# Altium PCB Panorama_V_0_0_1.PcbDoc (part 2 of 2)
Units mm, origin at the board's own origin, x right, y up, seen from the top; angles counter-clockwise.
Board outline 60 x 100 mm, 4 copper layers (Top Layer, Layer 2, Layer 3, Bottom Layer), stack 0.745 mm thick; 113 components, 88 nets, 449 pads, 202 vias.
Unrouted connection lines stored in the file: 3.
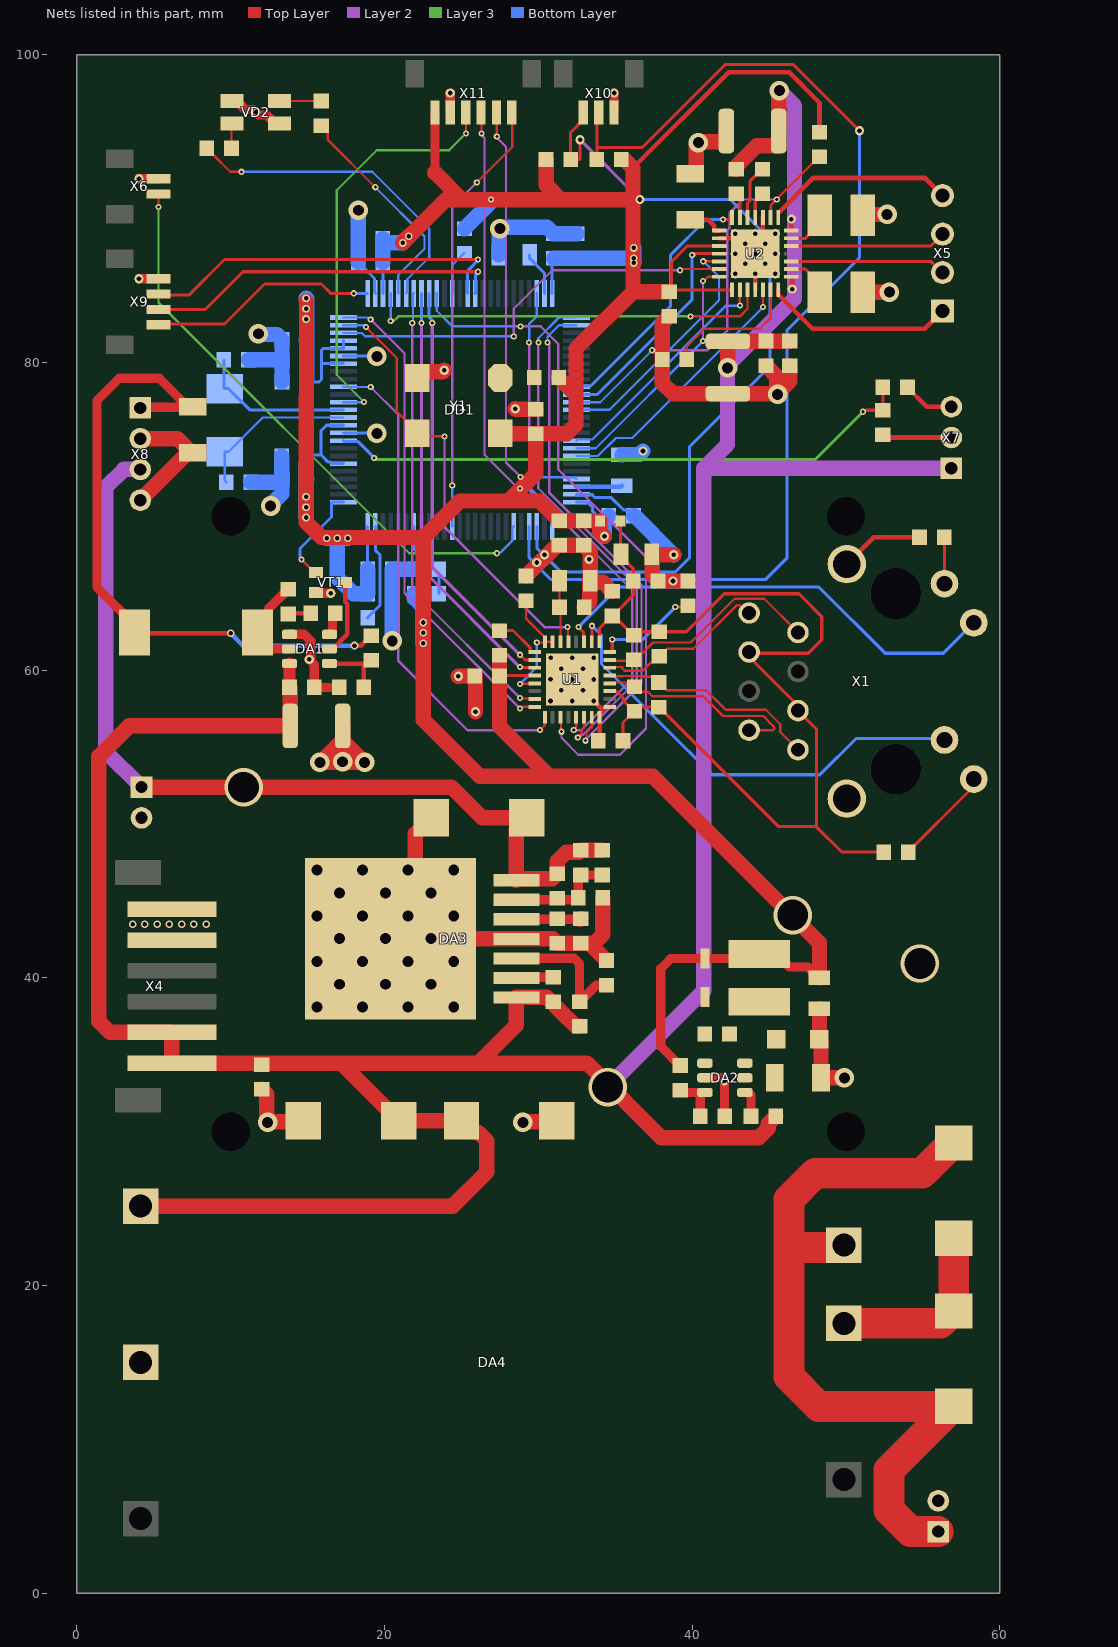
[diagram p4: the nets of this part, all layers, seen from the top]

## Via types
v1: diameter 0.6, hole 0.3, Top Layer to Layer 3, 42 vias
v2: diameter 1.27, hole 0.711, Top Layer to Layer 3, 35 vias
v3: diameter 0.4, hole 0.2, Layer 3 to Bottom Layer, 23 vias
v4: diameter 0.4, hole 0.2, Top Layer to Layer 3, 21 vias
v5: diameter 0.5, hole 0.3, Top Layer to Bottom Layer, tented both sides, 19 vias
v6: diameter 0.4, hole 0.2, Top Layer to Layer 2, 17 vias
v7: diameter 0.4, hole 0.2, Layer 2 to Bottom Layer, 15 vias
v8: diameter 1.27, hole 0.711, Layer 3 to Bottom Layer, 7 vias
v9: diameter 0.5, hole 0.3, Top Layer to Layer 3, tented both sides, 7 vias
v10: diameter 2.5, hole 2, Top Layer to Bottom Layer, 4 vias
v11: diameter 0.6, hole 0.3, Top Layer to Bottom Layer, 3 vias
v12: diameter 0.6, hole 0.3, Top Layer to Layer 2, 3 vias
v13: diameter 0.4, hole 0.2, Top Layer to Bottom Layer, 2 vias
v14: diameter 1.27, hole 0.711, Top Layer to Layer 2, 2 vias
v15: diameter 0.6, hole 0.3, Layer 2 to Bottom Layer, 1 vias
v16: diameter 0.6, hole 0.3, Layer 3 to Bottom Layer, 1 vias

## Nets (pads, with @x,y where several pads share a name; then routed paths per layer and width w, separated by ;. In a path a pad name is that pad's centre, name@x,y a point inside that pad or via, vN(x,y) a via of type N, cw(c..) or ccw(c..) an arc to the next point about the centre after c; other vN are vias at no path point)
+3V3: C8.2 C19.2 C20.2 C26.2 C27.2 C33.1 C40.2 C41.2 C42.2 C43.2 C44.2 C45.2 C46.2 C47.2 C48.2 C49.2 C50.2 C51.2 D3.1 DD1.6 DD1.11 DD1.19 DD1.21 DD1.22 DD1.28 DD1.50 DD1.75 DD1.100 FL1.1 L2.2 R5.2 R18.1 R21.2 R22.1 R26.2 R27.2 R31.1 R32.1 U1.12 U2.10 U2.15 X11.1 Y1.4 | length 257.2
  Top Layer w0.2: C26.2@27.475,59.625 27.501,59.651 28.671,59.651 U1.12@29.75,59.651 ; U2.10@41.75,87.575 39.675,87.575 38.65,86.55 38.65,84.725 U2.15@42.6,84.725
  Top Layer w0.3: 36.15,92.65 42.375,98.875 46.3,98.875 48.275,96.9 R26.2@48.275,94.975 ; C33.1@38.5,84.6 38.625,84.725 C33.1@38.65,84.725
  Top Layer w0.6: 23.275,92.35 X11.1@23.275,96.25 ; R5.2@39.225,34.3 39.2,34.3 37.95,35.55 37.95,40.6 38.6,41.25 D3.1@40.825,41.25 44.075,41.25 L2.2@44.375,41.55 45.475,41.55 46.325,40.7 47.524,40.7 47.875,40.349 47.875,40.175 48.05,40 C8.2@48.275,40
  Top Layer w1: v5@14.9,84 14.925,83.975 14.925,82.825 14.925,77.8 14.9,77.8 v5(14.9,71.275) v5(14.9,70.6) v5(14.9,69.925) 14.9,69.625 15.9,68.625 16.925,68.625 17.6,68.625 22.525,68.625 ; v5(21.175,87.775) 21.175,87.8 v5(21.575,88.2) ; v5@21.613,88.213 22.575,89.175 23.975,90.575 25.05,90.575 ; 23.275,92.35 25.05,90.575 ; v4@26.975,90.6 26.025,90.6 26,90.575 25.05,90.575 ; v4@27,90.575 31.475,90.575 ; R18.1@27.475,60.975 C26.2@27.475,59.625 27.475,56.35 30.7,53.125 ; Y1.4@27.525,75.4 27.55,75.375 C27.2@29.825,75.375 ; R32.1@30.525,93.2 30.525,91.525 31.475,90.575 ; R21.2@31.325,79.025 32.45,77.9 ; v11(34.3,68.7) 34.001,68.999 FL1.1@34.001,69.697 32.976,69.697 C20.2@32.951,69.722 C19.2@31.351,69.722 30.073,71 28.075,71 ; R31.1@35.6,93.2 36.15,92.65 36.15,90.575 ; v5@36.15,86.525 v5(36.2,86.475) ; C33.1@38.5,84.6 36.15,84.6 ; C8.2@48.275,40 48.275,40.349 48.275,42.275 46.503,44.046 37.45,53.1 30.7,53.1 26.2,53.1 22.525,56.775 v5(22.525,61.75) v5(22.525,62.425) v5(22.525,63.1) 22.525,68.625 ; 22.525,68.625 24.9,71 28.075,71 ; 28.075,71 29.825,72.75 C27.2@29.825,75.375 ; C27.2@29.825,75.375 31.864,75.375 32.45,75.961 32.45,77.9 ; 31.475,90.575 36.15,90.575 ; 32.45,77.9 32.45,80.9 36.15,84.6 ; 36.15,84.6 36.15,86.1 36.15,86.775 36.15,87.45 36.15,90.575
  Bottom Layer w0.2: C48.2@14.91,73.9 15.01,74 15.871,74 ; C50.2@14.935,78.744 15.744,78.744 15.9,78.9 15.9,79.85 ; C46.2@14.935,80.125 C46.2@15.135,79.925 ; C49.2@14.935,81.5 C49.2@15.01,81.425 ; DD1.6@17.325,73.425 16.6,73.425 16.5,73.525 16.346,73.525 15.871,74 ; DD1.11@17.325,75.925 16.225,75.925 15.871,75.571 15.871,74 ; DD1.19@17.325,79.925 15.975,79.925 15.9,79.85 ; DD1.22@17.325,81.425 DD1.21@17.325,80.925 16.025,80.925 15.9,80.8 15.9,79.85 ; DD1.100@18.9,69.35 18.9,66.56 C51.2@18.91,66.55 ; C44.2@19.885,86.525 19.9,86.51 DD1.28@19.9,84.5 ; DD1.50@30.9,84.5 30.9,86.69 C47.2@30.985,86.775 ; DD1.75@32.475,70.925 33.2,70.925 33.533,70.592 33.533,70.327 33.81,70.05 C45.2@34.585,70.05
  Bottom Layer w1: v5(14.9,69.925) v5(14.9,70.6) v5(14.9,71.275) 14.9,72.365 C43.2@14.935,72.4 14.902,72.433 C48.2@14.902,73.425 ; C49.2@14.9,81.465 C49.2@14.935,81.5 ; v5(14.9,84.175) v5@14.935,84.14 ; C50.2@14.935,78.744 C46.2@14.935,80.125 C49.2@14.935,81.5 ; v5(16.25,68.575) v5(16.925,68.575) ; v5(17.6,68.575) v5(16.925,68.575) ; C51.2@18.91,66.55 C40.2@18.91,64.975 17.975,64.975 16.925,66.025 v5(16.925,68.575) ; C44.2@19.885,86.525 C41.2@19.885,88.05 20.16,87.775 v5(21.175,87.775) 21.175,87.8 v5(21.575,88.2) ; R27.2@21.935,64.975 21.935,64.681 22.525,64.091 v5(22.525,63.1) v5(22.525,62.425) v5(22.525,61.75) ; R22.1@25.2,88.7 26.925,90.425 v3(26.925,90.6) ; C47.2@30.985,86.775 C42.2@32.51,86.775 35.525,86.775 v5(36.2,86.775) ; v11(34.3,68.7) 34.3,69.765 C45.2@34.585,70.05 ; v5(36.2,86.475) v5(36.2,86.775) ; v5(36.2,87.45) v5(36.2,86.775) ; C49.2@14.935,81.5 v5@14.935,84.14 ; C49.2@14.935,81.5 14.935,83.5 v5@14.935,84.14
  other v4: 26.925,90.6
  other v5: 14.9,82.825 14.9,83.5
  other v10: 46.539,44.082
+3V3_LAN: C18.2 C21.1 C22.1 C25.2 FL1.2 R12.2 R13.2 R14.2 R15.2 R16.2 U1.1 U1.27 X1.3 X1.6 | length 69.5
  Top Layer w0.2: U1.1@33.979,61.848 33.979,62.725 34.776,63.522 C22.1@34.801,63.522 ; U1.27@34.652,58.635 34.679,58.608 35.117,58.608 35.501,58.224 35.501,58.047 R16.2@36.226,57.322 ; FL1.2@35.351,69.697 35.351,67.547 C18.2@35.376,67.522 35.376,67.297 35.751,66.922 35.853,66.922 36.175,66.6 C25.2@36.175,65.8 36.175,64.871 34.826,63.522 C22.1@34.801,63.522 ; C21.1@35.501,55.422 35.501,56.597 R16.2@36.226,57.322 ; R12.2@52.453,48.174 49.726,48.174 48.075,49.825 ; C22.1@34.801,63.522 35.176,63.147 35.301,63.147 36.176,62.272 R13.2@36.201,62.272 36.426,62.497 R14.2@37.851,62.497 39.622,62.497 40.425,63.3 42.094,64.969 46.939,64.969 47.058,64.85 48.425,63.483 48.425,61.975 47.55,61.1 43.782,61.1 X1.6@43.703,61.179 43.703,61.1 43.703,60.861 46.878,57.686 X1.3@46.878,57.369 48.075,56.172 48.075,49.825 ; R16.2@36.226,57.322 R16.2@36.251,57.322 36.526,57.597 R15.2@37.826,57.597 37.851,57.597 45.623,49.825 48.075,49.825
+5V: C9.2 C10.2 C15.1 DA3.7 R7.2 X2.1 X8.3 | length 60.3
  Top Layer w1: X2.1@4.2,52.4 24.353,52.4 26.344,50.409 C15.1@29.249,50.409 29.249,50.334 28.575,49.66 DA3.7@28.575,46.345 28.681,46.451 30.917,46.451 R7.2@31.229,46.764 31.229,47.589 31.815,48.175 32.64,48.175 C9.2@32.753,48.288 C10.2@34.15,48.288
  Layer 2 w1: X8.3@4.125,73.05 3.05,73.05 1.875,71.875 1.875,54.725 X2.1@4.2,52.4
  other v10: 10.839,52.382
+12V: C1.2 C3.2 C4.1 C7.2 C13.1 C14.1 C35.1 C36.2 C37.2 C38.2 C39.2 DA1.3 DA2.5 DA3.1 DA4.4 R4.2 R8.1 R9.2 U2.22 U2.28 X4.1 X4.2 X7.1 | length 231.8
  Top Layer w0.3: C37.2@45.625,94.1 C37.2@45.625,95.05 ; C38.2@46.35,81.4 C38.2@46.45,81.5 ; U2.22@46.45,85.575 46.475,85.575 46.5,85.55 v12(46.5,84.775) ; U2.28@46.45,88.575 v12(46.45,89.325)
  Top Layer w0.8: C4.1@13.825,58.879 DA1.3@13.825,60.429
  Top Layer w1: DA4.4@4.14,25.16 24.435,25.16 26.65,27.375 26.65,29.389 26.064,29.975 25.65,29.975 25,30.625 C14.1@25,30.7 C13.1@20.925,30.7 20.925,30.775 20.275,31.425 20.2,31.425 17.175,34.45 ; C4.1@13.825,58.879 13.875,58.829 C3.2@13.875,56.379 3.404,56.379 1.425,54.4 1.425,37.175 2.15,36.45 X4.2@6.175,36.45 X4.1@6.175,34.45 17.175,34.45 ; R9.2@32.703,36.854 32.421,36.854 31.946,37.329 31.934,37.329 31.553,37.71 31.553,37.722 30.55,38.725 DA3.1@28.575,38.725 28.575,36.925 26.1,34.45 ; v14(42.3,79.65) 42.312,79.662 42.312,81.375 C36.2@42.325,81.375 46.325,81.375 C38.2@46.35,81.4 ; C35.1@42.875,92.575 42.875,92.769 44.206,94.1 C37.2@45.625,94.1 ; R4.2@45.425,31 44.95,30.525 44.95,30.231 44.319,29.6 38,29.6 33.15,34.45 26.1,34.45 ; C37.2@45.625,95.05 45.625,97.625 v14(45.675,97.675) ; 17.175,34.45 26.1,34.45
  Layer 2 w1: v10(34.5,32.9) 40.75,39.15 40.75,53.85 40.75,73.125 ; v14(45.675,97.675) 46.65,96.7 46.65,89.325 46.65,84.775 46.65,84.15 42.3,79.8 v14(42.3,79.65) 42.3,74.675 40.75,73.125 ; X7.1@56.85,73.125 40.75,73.125
+PWR_LASER: C5.2 L1.2 R2.2 X8.1 | length 43.2
  Top Layer w0.3: L1.2@3.75,62.45 3.8,62.5 3.9,62.4 v5(10,62.4) ; v5(18.05,61.6) 18.45,61.6 19.1,62.25 R2.2@19.125,62.25
  Top Layer w0.6: L1.2@3.75,62.45 3.75,62.95 1.3,65.4 1.3,77.525 2.75,78.975 5.35,78.975 7.2,77.125 C5.2@7.525,77.125 7.488,77.088 4.163,77.088 X8.1@4.125,77.05
  Bottom Layer w0.3: v5(10,62.4) 10.8,61.6 v5(18.05,61.6)
+V_EXT: C11.1 C12.1 DA4.3 X3.1 | length 51.2
  Top Layer w2: DA4.3@49.86,22.62 49.71,22.47 46.47,22.47 46.3,22.3 ; X3.1@56,4 54.2,4 52.8,5.4 52.8,8.015 C12.1@56.925,12.14 ; C12.1@57,12.14 C12.1@56.925,12.14 ; C11.1@57,29.262 56.925,29.262 54.963,27.3 48,27.3 46.3,25.6 46.3,22.3 ; 46.3,22.3 46.3,14.072 48.232,12.14 C12.1@56.925,12.14
BASLER_INPUT_LINE: DD1.81 X6.1 | length 38.1
  Top Layer w0.15: v4(5.3,90.1) 5.3,90.937 X6.1@5.313,90.95
  Layer 3 w0.15: v4(5.3,90.1) 5.3,83.9 21.6,67.6 v3(27.3,67.6)
  Bottom Layer w0.15: v3(27.3,67.6) 27.348,67.648 27.541,67.648 28.325,68.432 28.325,69.275 DD1.81@28.4,69.35
CLK: DD1.23 U2.13 | length 27.4
  Top Layer w0.15: v6(39.2,86) 39.268,86 39.343,86.075 U2.13@41.75,86.075
  Layer 2 w0.15: v7(28.4,81.7) 28.4,83.5 30.9,86 v6(39.2,86)
  Bottom Layer w0.15: DD1.23@17.325,81.925 18.525,81.925 18.751,81.7 v7(28.4,81.7)
DAC: DD1.29 U2.17 | length 26.6
  Top Layer w0.15: v4(39.9,83) 43.1,83 43.6,83.5 U2.17@43.6,84.725
  Layer 3 w0.15: v3(20.4,82.7) 20.6,82.7 20.9,83 v4(39.9,83)
  Bottom Layer w0.15: v3(20.4,82.7) DD1.29@20.4,84.5
DIAG: DD1.61 U2.11 | length 14.8
  Top Layer w0.2: v3(40,87) 40.054,87 40.129,87.075 U2.11@41.75,87.075
  Bottom Layer w0.2: DD1.61@32.475,77.925 33.825,77.925 40,84.1 v3(40,87)
  other v4: 40,87
DIR: DD1.69 U2.19 | length 17.3
  Top Layer w0.15: v3(44.6,83.6) U2.19@44.6,84.725
  Bottom Layer w0.15: DD1.69@32.475,73.925 33.867,73.925 35.042,75.1 36.1,75.1 v3(44.6,83.6)
  other v4: 44.6,83.6
E\N\A\B\L\E\_Step: DD1.62 R26.1 U2.2 | length 28.2
  Top Layer w0.15: U2.2@45.1,89.425 45.1,90.2 v6(45.5,90.6) 45.5,90.625 48.25,93.375 R26.1@48.275,93.375
  Layer 2 w0.15: v7(37.4,80.8) 41,80.8 42.275,82.075 42.275,88.593 42.425,88.743 42.425,89.725 43.3,90.6 v6(45.5,90.6)
  Bottom Layer w0.15: DD1.62@32.475,77.425 34.025,77.425 v7(37.4,80.8)
EN_LED: DD1.40 X9.2 | length 23.2
  Top Layer w0.2: X9.2@5.313,83.45 8.35,83.45 10.8,85.9 v4(26.075,85.9)
  Bottom Layer w0.2: DD1.40@25.9,84.5 25.904,84.504 25.904,85.675 26.075,85.846 v4(26.075,85.9)
  other v3: 26.075,85.9
ETH_CRS_DV: DD1.32 U1.15 | length 30.2
  Top Layer w0.15: v6(28.8,58.2) 28.837,58.164 29.713,58.164 U1.15@29.75,58.127
  Layer 2 w0.15: v7(21.8,82.575) 21.8,65.2 v6(28.8,58.2)
  Bottom Layer w0.15: v7(21.8,82.575) 21.848,82.623 21.848,84.448 DD1.32@21.9,84.5
ETH_MDC: DD1.16 U1.17 | length 32.4
  Top Layer w0.15: v6(30.1,56.1) 30.35,56.35 30.409,56.409 30.409,56.931 U1.17@30.423,56.946
  Layer 2 w0.15: v7(19.1,78.4) 20.9,76.6 20.9,60.6 25.4,56.1 v6(30.1,56.1)
  Bottom Layer w0.15: DD1.16@17.325,78.425 17.337,78.412 19.087,78.412 v7(19.1,78.4)
ETH_MDIO: DD1.25 U1.16 | length 32.1
  Top Layer w0.15: v6(28.8,57.5) 28.868,57.5 28.987,57.619 U1.16@29.75,57.619
  Layer 2 w0.15: v7(19.1,82.8) 21.3,80.6 21.3,65 v6(28.8,57.5)
  Bottom Layer w0.15: DD1.25@17.325,82.925 18.907,82.925 19.032,82.8 v7(19.1,82.8)
ETH_REF_CLK: DD1.24 U1.5 Y1.3 | length 29.2
  Top Layer w0.15: v4(18.8,82.3) 20.8,80.3 20.8,76.825 22.125,75.5 Y1.3@22.125,75.4 22.325,75.2 v6(23.9,75.2) ; v6(31.9,62.8) 31.924,62.776 31.924,61.872 U1.5@31.947,61.848
  Layer 2 w0.15: v6(23.9,75.2) 23.9,69.3 30.4,62.8 v6(31.9,62.8)
  Bottom Layer w0.15: DD1.24@17.325,82.425 18.675,82.425 v4(18.8,82.3)
  other v3: 18.8,82.3
ETH_RXD0: DD1.33 U1.11 | length 27.9
  Top Layer w0.2: v6(28.8,60.2) 28.821,60.18 29.729,60.18 U1.11@29.75,60.159
  Layer 2 w0.2: v7(22.4,82.575) 22.4,66.6 v6(28.8,60.2)
  Bottom Layer w0.2: v7(22.4,82.575) DD1.33@22.4,84.5
ETH_RXD1: DD1.34 U1.10 | length 27
  Top Layer w0.2: v6(28.8,61) 29.133,60.667 U1.10@29.75,60.667
  Layer 2 w0.2: v7(23.1,82.575) 23.1,66.7 v6(28.8,61)
  Bottom Layer w0.2: DD1.34@22.9,84.5 22.9,82.954 23.1,82.754 v7(23.1,82.575)
ETH_TX_EN: DD1.48 U1.21 | length 34.1
  Top Layer w0.15: v6(32.3,56.1) 32.3,56.159 32.455,56.314 U1.21@32.455,56.946
  Layer 2 w0.15: v7(29.4,81.3) 29.4,71.9 36.1,65.2 36.1,59.43 32.77,56.1 v6(32.3,56.1)
  Bottom Layer w0.15: v7(29.4,81.3) 29.4,82.5 29.9,83 DD1.48@29.9,84.5
ETH_TXD0: DD1.51 U1.22 | length 34.8
  Top Layer w0.15: v6(32.564,55.618) 32.564,55.685 32.824,55.945 32.824,56.092 32.963,56.231 U1.22@32.963,56.946
  Layer 2 w0.15: v7(30,81.3) 30,71.833 36.4,65.433 36.4,59.306 32.894,55.8 32.859,55.8 32.782,55.723 32.652,55.723 32.564,55.635 v6(32.564,55.618)
  Bottom Layer w0.15: v7(30,81.3) 30,81.581 31.344,82.925 DD1.51@32.475,82.925
ETH_TXD1: DD1.52 U1.23 | length 34.2
  Top Layer w0.15: v6(33.076,55.416) 33.124,55.464 33.124,55.805 33.134,55.815 33.134,55.948 33.471,56.285 U1.23@33.471,56.946
  Layer 2 w0.15: v7(30.6,81.3) 30.7,81.2 30.7,71.558 36.7,65.558 36.7,59.123 35.6,58.023 33.076,55.499 v6(33.076,55.416)
  Bottom Layer w0.15: v7(30.6,81.3) 30.6,81.681 31.344,82.425 DD1.52@32.475,82.425
ETHERNET_RST: DD1.35 U1.19 | length 45.3
  Top Layer w0.15: U1.19@31.439,56.946 31.47,56.915 31.47,56.03 v6(31.5,56)
  Layer 2 w0.15: v7(28.85,82.35) 30.151,82.35 31.3,81.201 31.3,73.05 37,67.35 37,56.2 35.303,54.503 32.597,54.503 31.5,55.6 v6(31.5,56)
  Bottom Layer w0.15: DD1.35@23.4,84.5 23.4,83.369 24.419,82.35 v7(28.85,82.35)
GND: C1.1 C3.1 C4.2 C5.1 C7.1 C8.1 C13.2 C14.2 C15.2 C16.1 C17.1 C18.1 C19.1 C20.1 C21.2 C22.2 C23.2 C24.2 C25.1 C26.1 C27.1 C29.1 C30.1 C31.1 C32.1 C33.2 C34.1 C36.1 C37.1 C38.1 C39.1 C40.1 C41.1 C42.1 C43.1 C44.1 C45.1 C46.1 C47.1 C48.1 C49.1 C50.1 C51.1 DA1.1 DA2.2 DA3.4 DA3.8 DA4.5 DD1.10 DD1.20 DD1.27 DD1.74 R3.1 R6.1 R10.1 R11.1 R17.2 R19.1 R20.1 R23.2 R24.1 R25.1 R29.2 R30.1 R36.1 U1.24 U1.25 U1.33 U2.3 U2.9 U2.18 U2.29 VD1.1 VD2.1 VD2.3 VT1.2 X1.13 X1.14 X2.2 X4.5 X4.6 X6.2 X7.3 X8.2 X8.4 X9.4 X10.3 X11.2 Y1.2 | length 199.4
  Top Layer w0.3: v1(32.201,59.397) 33.597,58.002 34.199,57.399 ; C21.2@33.901,55.422 33.979,55.5 U1.24@33.979,56.946 33.979,57.179 34.199,57.399 ; U1.25@34.652,57.619 34.419,57.619 34.199,57.399 ; U2.9@41.75,88.075 43.1,88.075 v1(43.45,87.725) v1(44.1,87.075) ; U2.18@44.1,84.725 v1(44.1,87.075) ; U2.3@44.6,89.425 44.6,87.575 v1(44.1,87.075) ; X1.13@50.053,66.894 51.809,68.65 R19.1@54.775,68.65 ; R36.1@54,78.4 54,78.375 55.25,77.125 X7.3@56.85,77.125
  Top Layer w0.6: v1(4.038,85.45) X9.4@5.313,85.45 ; v1(4.038,91.95) X6.2@5.313,91.95 ; VD2.3@10.075,97 10.375,97 10.925,96.45 11.45,96.45 v1(11.625,96.275) 11.8,96.1 12.325,96.1 12.875,95.55 VD2.1@13.175,95.55 ; DA1.1@13.825,62.329 14.771,62.329 15.2,61.9 15.2,60.8 v1(15.1,60.7) 15.425,60.375 C4.2@15.425,58.879 R3.1@17.05,58.879 ; VT1.2@15.55,65.05 15.6,65 v1(16.5,65) ; X11.2@24.275,96.25 v1(24.275,97.525) ; X10.3@34.921,96.25 34.921,97.521 v1(34.925,97.525) ; DA2.2@40.825,33.5 41.9,33.5 v1(42.1,33.3) 42.1,31.025 R6.1@42.125,31
  Top Layer w1: X8.4@4.125,71.05 7.125,74.05 C5.1@7.125,74.2 ; X8.2@4.125,75.05 6.539,75.05 7.125,74.464 C5.1@7.125,74.2 ; C5.1@7.525,74.125 7.2,74.125 C5.1@7.125,74.2 ; C1.1@12.025,32.75 12.348,32.427 12.348,30.652 v2(12.4,30.6) 12.45,30.65 14.675,30.65 C13.2@14.725,30.7 ; v2(15.8,54) v2@15.846,54 ; v2@17.2,53.973 v2@17.227,54 ; C3.1@17.275,56.379 C3.1@17.275,55.429 ; Y1.2@22.125,79 22.125,79.1 22.425,79.4 23.775,79.4 v1(23.875,79.5) ; C15.2@23.049,50.409 C15.2@21.999,49.359 ; v1(24.8,59.6) 24.825,59.625 C26.1@25.875,59.625 25.915,59.585 v1(25.915,57.303) ; v1(28.5,77) 28.525,76.975 C27.1@29.825,76.975 ; v2(29,30.6) 29.05,30.65 31.15,30.65 C14.2@31.2,30.7 ; v1@29.988,66.913 R20.1@29.2,66.125 C19.1@31.197,68.122 ; v1@30.488,67.413 C19.1@31.197,68.122 ; C24.2@32.976,64.097 33.351,64.472 33.351,65.797 C23.2@33.376,65.822 ; R10.1@34.188,45.202 34.188,42.813 33.618,42.243 33.314,42.243 ; R11.1@34.428,41.129 33.314,42.243 ; C22.2@34.801,65.122 34.201,65.722 33.401,65.722 33.376,65.747 C23.2@33.376,65.822 ; C18.1@37.376,67.522 C18.1@37.398,67.5 ; C33.2@38.5,83 38.05,82.55 R30.1@38.05,80.2 38.05,78.675 38.75,77.975 C36.1@42.325,77.975 v2@45.5,77.975 ; v11(38.8,67.5) C18.1@37.398,67.5 ; R17.2@39.725,65.8 v1(38.75,65.8) C25.1@37.775,65.8 37.401,66.174 37.401,67.497 C18.1@37.398,67.5 ; C29.1@39.875,92.275 40.2,92.275 40.275,92.35 40.275,94.102 40.4,94.227 v2(40.4,94.3) 40.452,94.352 42.225,94.352 C37.1@42.225,95.05 ; C39.1@44.8,79.8 45.498,79.102 45.498,77.977 v2@45.5,77.975 ; v2(45.55,77.925) v2@45.5,77.975 ; C38.1@46.35,79.8 46.35,78.798 45.527,77.975 v2@45.5,77.975 ; C8.1@48.275,38 VD1.1@48.275,36 48.375,35.9 C7.1@48.375,33.5 v2(49.9,33.5) ; R24.1@51.1,84.575 v2(52.825,84.575) ; R25.1@51.1,89.575 51.15,89.625 v2(52.675,89.625) ; v2@15.846,54 C3.1@17.275,55.429 ; v2@15.846,54 v2@17.227,54 ; v2@17.227,54 v2(18.7,54) 18.7,54.004 C3.1@17.275,55.429 ; v2@17.227,54 v2(17.275,54.048) C3.1@17.275,55.429 ; DA3.8@21.999,44.151 21.999,47 C15.2@21.999,49.359 ; DA3.8@21.999,44.151 C15.2@21.999,49.359 ; DA3.8@21.999,44.151 DA3.8@20.383,42.535 DA3.4@28.575,42.535 30.937,42.535 C17.1@31.229,42.243 C16.1@32.753,42.243 33.314,42.243 ; C19.1@31.197,68.122 C19.1@31.351,68.122 C20.1@32.951,68.122 33.376,67.697 C23.2@33.376,65.822
  Bottom Layer w0.2: DD1.10@17.325,75.425 17.375,75.425 17.4,75.4 17.413,75.412 19.487,75.412 v8(19.5,75.4) ; DD1.20@17.325,80.425 17.337,80.412 19.487,80.412 v8(19.5,80.4) ; C44.1@18.285,86.525 18.285,86.5 18.66,86.125 18.685,86.125 19.35,85.46 19.35,84.55 DD1.27@19.4,84.5 ; DD1.74@32.475,71.425 32.497,71.403 33.502,71.403 33.685,71.22 34.744,71.22 35.55,70.414 35.821,70.414 C45.1@36.185,70.05
  Bottom Layer w1: C31.1@11.16,80.175 13.285,80.175 C46.1@13.335,80.125 ; C30.1@11.31,72.225 13.16,72.225 C43.1@13.335,72.4 ; v8(11.8,81.873) 11.852,81.821 13.014,81.821 C49.1@13.335,81.5 C46.1@13.335,80.125 ; v8(12.6,70.673) 12.6,70.746 13.335,71.481 C43.1@13.335,72.4 ; C48.1@13.31,73.9 13.31,72.425 C43.1@13.335,72.4 ; C50.1@13.335,78.744 C46.1@13.335,80.125 ; C44.1@18.285,86.525 C41.1@18.285,88.05 18.285,89.885 v8(18.3,89.9) ; v8(20.5,61.9) 20.51,61.91 R23.2@20.51,63.4 C40.1@20.51,64.975 C51.1@20.51,66.55 R29.2@21.935,66.55 ; C32.1@27.435,87 27.46,87.025 v8@27.46,88.575 ; v8(27.5,88.7) 27.573,88.7 27.673,88.8 30.56,88.8 C47.1@30.985,88.375 C42.1@32.51,88.375 ; C34.1@35.435,74 35.46,74.025 36.575,74.025 v16(36.8,74.25) ; C45.1@36.185,70.05 36.25,70.05 v11(38.8,67.5)
  other v1: 30.793,57.998 32.193,57.998 33.593,57.998 31.5,58.7 32.9,58.7 33.601,59.397 30.793,59.398 31.5,60.1 32.9,60.1 30.801,60.797 32.201,60.797 33.601,60.797 29.9,67 33.3,67.2 30.4,67.5 42.8,85.775 44.1,85.775 45.4,85.775 43.45,86.425 44.75,86.425 42.8,87.075 45.4,87.075 44.75,87.725 42.8,88.375 44.1,88.375 45.4,88.375
  other v2: 15.6,38.1 18.567,38.1 21.533,38.1 24.5,38.1 17.083,39.583 20.05,39.583 23.017,39.583 15.6,41.067 18.567,41.067 21.533,41.067 24.5,41.067 17.083,42.55 20.05,42.55 23.017,42.55 15.6,44.033 18.567,44.033 21.533,44.033 24.5,44.033 17.083,45.517 20.05,45.517 23.017,45.517 15.6,47 18.567,47 21.533,47 24.5,47
  other v9: 3.625,43.475 4.421,43.475 5.217,43.475 6.012,43.475 6.808,43.475 7.604,43.475 8.4,43.475
  other v10: 54.805,40.93
GND_EXT: C11.2 C12.2 DA4.2 X3.2 | length 12.2
  Top Layer w2: DA4.2@49.86,17.54 56.125,17.54 56.925,18.34 C12.2@57,18.34 C11.2@57,23.062
GR_A: R12.1 X1.9 | length 6.5
  Top Layer w0.2: R12.1@54.053,48.174 54.053,48.199 58.002,52.148 58.002,52.618 X1.9@58.308,52.924
GR_K: U1.2 X1.10 | length 30.1
  Top Layer w0.2: U1.2@33.471,61.848 33.486,61.863 v4(33.486,62.886)
  Bottom Layer w0.2: v4(33.486,62.886) 34.1,62.271 34.1,60.4 38.2,56.3 41.3,53.2 48.3,53.2 50.659,55.559 56.308,55.559 X1.10@56.403,55.464
  other v3: 33.486,62.886
INDEX: DD1.63 U2.12 | length 16.2
  Top Layer w0.15: v4(40.718,86.582) 40.722,86.578 41.747,86.578 U2.12@41.75,86.575
  Bottom Layer w0.15: DD1.63@32.475,76.925 34.625,76.925 41.75,84.05 41.75,85.575 40.743,86.582 v4(40.718,86.582)
  other v3: 40.718,86.582
LASER_CURRENT: DD1.26 X9.1 | length 14.9
  Top Layer w0.2: X9.1@5.313,82.45 5.362,82.5 9.6,82.5 12.2,85.1 15.9,85.1 16.5,84.5 v4(18,84.5)
  Bottom Layer w0.2: v4(18,84.5) DD1.26@18.9,84.5
  other v3: 18,84.5
LASER_ENABLE: DD1.1 VT1.1 | length 6.7
  Top Layer w0.2: v3(14.6,67.2) 15.45,66.35 VT1.1@15.55,66.35
  Bottom Layer w0.2: v3(14.6,67.2) 14.5,67.3 14.5,67.912 16.55,69.962 16.55,70.875 16.6,70.925 DD1.1@17.325,70.925
  other v4: 14.6,67.2
LED_GREEN: DD1.30 R33.1 | length 14.4
  Top Layer w0.15: R33.1@15.875,95.4 15.9,95.4 16.3,95 16.3,94.5 v4(19.4,91.4)
  Bottom Layer w0.15: v4(19.4,91.4) 22.6,88.2 22.6,87.4 20.9,85.7 DD1.30@20.9,84.5
  other v3: 19.4,91.4
LED_RED: DD1.31 R34.1 | length 21.5
  Top Layer w0.15: R34.1@8.45,93.925 8.45,93.9 8.85,93.5 8.875,93.5 9.975,92.4 v4(10.7,92.4)
  Bottom Layer w0.15: v4(10.7,92.4) 19.2,92.4 22.9,88.7 22.9,86.843 21.475,85.418 21.475,84.575 DD1.31@21.4,84.5
  other v3: 10.7,92.4
MOTOR_A1: U2.24 X5.2 | length 10.1
  Top Layer w0.2: U2.24@46.45,86.575 55.515,86.575 56.24,85.85 X5.2@56.275,85.85
MOTOR_A2: U2.21 X5.1 | length 12.4
  Top Layer w0.3: U2.21@45.6,84.725 45.6,84.425 47.825,82.2 55.125,82.2 X5.1@56.275,83.35
MOTOR_B1: U2.26 X5.3 | length 10.1
  Top Layer w0.2: U2.26@46.45,87.575 55.5,87.575 X5.3@56.275,88.35
MOTOR_B2: U2.1 X5.4 | length 12.1
  Top Layer w0.3: U2.1@45.625,89.75 47.875,92 55.125,92 X5.4@56.275,90.85
NERROR: DD1.39 X9.3 | length 24.2
  Top Layer w0.2: X9.3@5.313,84.45 5.363,84.4 7.3,84.4 9.6,86.7 v3(26.075,86.7)
  Bottom Layer w0.2: DD1.39@25.4,84.5 25.4,85.971 26.075,86.646 v3(26.075,86.7)
  other v4: 26.075,86.7
NetC2_1: C2.1 DA1.2 L1.1 | length 6.4
  Top Layer w0.6: C2.1@13.75,65.25 13.725,65.25 12.45,63.975 12.45,62.779 11.936,62.264 11.75,62.079 12.45,61.379 DA1.2@13.825,61.379
NetC2_2: C2.2 R1.2 | length 1.5
  Top Layer w0.3: C2.2@13.75,63.65 13.8,63.7 R1.2@15.2,63.7
NetC6_1: C6.1 DA2.6 L2.1 VD1.2
NetC6_2: C6.2 D3.2 DA2.1
NetC9_1: C9.1 C10.1 DA3.6 R7.1 R10.2 | length 7
  Top Layer w0.6: DA3.6@28.575,45.075 32.461,45.075 R10.2@32.588,45.202 32.588,46.523 C9.1@32.753,46.688 C10.1@34.15,46.688
NetC16_2: C16.2 C17.2 DA3.5 | length 4.2
  Top Layer w0.6: DA3.5@28.575,43.805 C16.2@32.715,43.805
  Top Layer w1: C16.2@32.715,43.805 C16.2@32.753,43.843
NetC23_1: C23.1 C24.1 U1.6 | length 4
  Top Layer w0.15: C23.1@31.376,65.822 C24.1@31.376,64.097 31.439,64.034 U1.6@31.439,61.848
NetC28_1: C28.1 U2.5 | length 3.6
  Top Layer w0.2: U2.5@43.6,89.425 43.6,90.371 43.75,90.521 43.75,91.775 44.55,92.575 C28.1@44.575,92.575
NetC28_2: C28.2 U2.4 | length 1.8
  Top Layer w0.2: U2.4@44.1,89.425 44.1,90.525 44.55,90.975 C28.2@44.575,90.975
NetC29_2: C29.2 U2.8 | length 2.3
  Top Layer w0.3: C29.2@39.875,89.275 41.05,89.275 41.425,88.9 41.425,88.6 41.45,88.575 U2.8@41.75,88.575
NetC32_2: C32.2 DD1.49 | length 2.9
  Bottom Layer w0.2: C32.2@29.435,87 29.435,86.775 30.4,85.81 DD1.49@30.4,84.5
NetC34_2: C34.2 DD1.73 | length 3
  Bottom Layer w0.3: DD1.73@32.475,71.925 35.36,71.925 C34.2@35.435,72
NetC35_2: C35.2 U2.6 | length 1.6
  Top Layer w0.2: C35.2@42.875,90.975 43.1,90.75 U2.6@43.1,89.425
NetDA1_4: DA1.4 R2.1 R3.2 | length 4.4
  Top Layer w0.3: DA1.4@16.425,60.429 R2.1@18.879,60.429 ; R3.2@18.65,58.879 18.65,60.2 R2.1@18.879,60.429 ; R2.1@19.125,60.65 19.1,60.65 R2.1@18.879,60.429
NetDA1_5: DA1.5 VT1.3 | length 5
  Top Layer w0.3: DA1.5@16.425,61.379 16.625,61.379 17.575,62.329 17.575,64.324 17.45,64.449 VT1.3@17.45,65.7
NetDA1_6: DA1.6 R1.1 | length 1.6
  Top Layer w0.6: DA1.6@16.425,62.329 16.625,62.329 16.625,62.529 16.625,63.525 R1.1@16.8,63.7
NetDA2_3: DA2.3 R5.1 R6.2 | length 3.3
  Top Layer w0.6: R5.1@39.225,32.7 39.375,32.55 DA2.3@40.625,32.55 ; R6.2@40.525,31 40.525,32.45 DA2.3@40.625,32.55 ; DA2.3@40.825,32.55 DA2.3@40.625,32.55
NetDA2_4: DA2.4 R4.1 | length 1.8
  Top Layer w0.6: DA2.4@43.425,32.55 43.625,32.55 43.825,32.35 R4.1@43.825,31
NetDA3_2: DA3.2 R8.2 | length 2.4
  Top Layer w0.6: DA3.2@28.575,39.995 28.613,40.033 R8.2@30.975,40.033
NetDA3_3: DA3.3 R9.1 R11.2 | length 8.6
  Top Layer w0.6: DA3.3@28.575,41.265 32.324,41.265 32.675,40.914 32.675,38.629 32.703,38.601 R9.1@32.703,38.454 ; R9.1@32.875,38.626 33.778,39.529 R11.2@34.428,39.529
NetDD1_37: DD1.37 R22.2 | length 2.9
  Bottom Layer w0.15: DD1.37@24.4,84.5 24.4,86.325 25.175,87.1 R22.2@25.2,87.1
NetDD1_94: DD1.94 R27.1 R29.1 | length 5.1
  Bottom Layer w0.2: DD1.94@21.9,69.35 21.9,67.914 23.535,66.279 R27.1@23.535,64.975
NetDD1_99: DD1.99 R23.1 | length 6.4
  Bottom Layer w0.2: R23.1@18.91,63.4 18.91,63.425 19.7,64.215 19.7,67.5 19.4,67.8 DD1.99@19.4,69.35
NetR17_1: R17.1 U1.32 | length 6.8
  Top Layer w0.2: U1.32@34.652,61.175 34.778,61.175 34.805,61.202 v4(34.805,62) ; v3(38.9,64.1) 39.625,64.1 R17.1@39.725,64.2
  Bottom Layer w0.2: v4(34.805,62) 36.8,62 v3(38.9,64.1)
  other v3: 34.805,62
  other v4: 38.9,64.1
NetR18_2: R18.2 U1.9 | length 3
  Top Layer w0.2: R18.2@27.475,62.575 28.35,62.575 29.471,61.454 29.471,61.202 29.498,61.175 U1.9@29.75,61.175
NetR20_2: R20.2 U1.7 U1.8 U1.13 | length 8.4
  Top Layer w0.15: v13(28.8,59.1) 28.821,59.121 29.729,59.121 U1.13@29.75,59.143 ; R20.2@29.2,64.525 29.2,63.351 30.423,62.127 U1.8@30.423,61.848 ; v3(29.9,61.8) 30.375,61.8 U1.8@30.423,61.848 ; U1.7@30.931,61.848 U1.8@30.423,61.848
  Bottom Layer w0.15: v13(28.8,59.1) 29.9,60.2 v3(29.9,61.8)
  other v3: 28.8,59.1
  other v13: 29.9,61.8
NetR21_1: R21.1 Y1.1
NetR24_2: R24.2 U2.23 | length 2.8
  Top Layer w0.2: U2.23@46.45,86.075 47.35,86.075 48.3,85.125 R24.2@48.3,84.575
NetR25_2: R25.2 U2.27 | length 2.8
  Top Layer w0.2: U2.27@46.45,88.075 47.35,88.075 48.3,89.025 R25.2@48.3,89.575
NetR30_2: R30.2 U2.20 | length 8.9
  Top Layer w0.15: R30.2@39.65,80.2 39.65,81.05 40.8,82.2 44.4,82.2 45.1,82.9 U2.20@45.1,84.725
NetR33_2: R33.2 VD2.4 | length 2.7
  Top Layer w0.15: VD2.4@13.175,97 R33.2@15.875,97
NetR34_2: R34.2 VD2.2 | length 1.6
  Top Layer w0.15: R34.2@10.05,93.925 10.05,95.525 VD2.2@10.075,95.55
NRST: DD1.14 X11.3 | length 27.2
  Top Layer w0.15: X11.3@25.275,96.25 25.3,96.225 v4(25.3,94.9)
  Layer 3 w0.15: v3(18.675,77.425) 16.9,79.2 16.9,91.2 19.5,93.8 24.2,93.8 v4(25.3,94.9)
  Bottom Layer w0.15: DD1.14@17.325,77.425 v3(18.675,77.425)
OSC_IN: C30.2 DD1.12 XTAL1.1 | length 10.7
  Bottom Layer w0.15: C30.2@9.71,72.225 9.61,72.325 XTAL1.1@9.61,74.2 9.86,74.2 12.085,76.425 DD1.12@17.325,76.425
OSC_OUT: C31.2 DD1.13 XTAL1.2 | length 10.2
  Bottom Layer w0.2: C31.2@9.56,80.175 9.56,78.35 XTAL1.2@9.61,78.3 9.86,78.3 11.235,76.925 DD1.13@17.325,76.925
Photo_Transistor: DD1.9 R35.1 R36.2 | length 38.4
  Top Layer w0.2: v4(51.1,76.8) 51.154,76.8 51.254,76.9 R35.1@52.4,76.9 R36.2@52.4,78.4
  Layer 3 w0.2: v3(19.329,73.8) 19.429,73.7 48,73.7 v4(51.1,76.8)
  Bottom Layer w0.2: DD1.9@17.325,74.925 17.375,74.875 18.254,74.875 v3(19.329,73.8)
Photo_Transistor_Out: R35.2 X7.2 | length 4.5
  Top Layer w0.3: R35.2@52.4,75.3 52.575,75.125 X7.2@56.85,75.125
RX_N: R14.1 U1.30 X1.8 | length 11.2
  Top Layer w0.15: U1.30@34.652,60.159 34.704,60.211 35.071,60.211 35.452,60.211 35.452,60.128 35.608,59.972 36.794,59.972 37.319,60.497 37.451,60.497 R14.1@37.851,60.897 37.876,60.897 38.276,61.297 38.276,61.305 38.364,61.393 40.069,61.393 42.916,64.24 43.04,64.24 43.561,63.719 X1.8@43.703,63.719
RX_P: R13.1 U1.31 X1.7 | length 14.8
  Top Layer w0.15: U1.31@34.652,60.667 34.704,60.615 36.144,60.615 R13.1@36.201,60.672 36.601,61.072 36.733,61.072 37.458,61.797 39.902,61.797 42.749,64.644 44.683,64.644 X1.7@46.878,62.449
RXD: DD1.79 R31.2 X10.2 | length 74.7
  Top Layer w0.2: X10.2@33.921,96.25 33.8,96.129 R31.2@33.8,93.2 33.8,93.98 36.754,93.98 42.139,99.365 46.584,99.365 v11(50.876,95.072)
  Bottom Layer w0.2: DD1.79@29.4,69.35 29.4,67.31 30.822,65.888 44.755,65.888 46.177,67.31 46.177,82.118 50.876,86.817 v11(50.876,95.072)
SPREAD: DD1.60 U2.7 | length 16.7
  Top Layer w0.2: v3(42,89.3) 42.575,89.3 42.6,89.325 U2.7@42.6,89.425
  Bottom Layer w0.2: DD1.60@32.475,78.425 32.525,78.475 33.404,78.475 38.6,83.671 38.6,87 40.9,89.3 v3(42,89.3)
  other v4: 42,89.3
STEP: DD1.67 U2.16 | length 15.3
  Top Layer w0.15: v4(43.1,83.7) U2.16@43.1,84.725
  Bottom Layer w0.15: DD1.67@32.475,74.925 32.55,75 33.5,75 42.2,83.7 v4(43.1,83.7)
  other v3: 43.1,83.7
SWCLK: DD1.76 X11.4 | length 29.2
  Top Layer w0.15: X11.4@26.275,96.25 26.3,96.225 v6(26.3,94.9)
  Layer 2 w0.15: v6(26.3,94.9) 26.3,94.8 26.5,94.6 26.5,74 28.599,71.901 28.632,71.901 28.732,71.8 v7(28.8,71.8)
  Bottom Layer w0.15: v7(28.8,71.8) 29.293,71.8 30.825,70.268 30.825,69.425 DD1.76@30.9,69.35
SWDIO: DD1.72 X11.5 | length 28
  Top Layer w0.15: X11.5@27.275,96.25 27.3,96.225 v6(27.3,94.7)
  Layer 2 w0.15: v6(27.3,94.7) 27.3,94.632 27.9,94.032 27.9,73.5 v7(28.85,72.55)
  Bottom Layer w0.15: v7(28.85,72.55) 32.35,72.55 DD1.72@32.475,72.425
TRACE_SWO: DD1.89 X11.6 | length 28.5
  Top Layer w0.15: v6(26,91.712) 28.3,94.013 28.3,96.225 X11.6@28.275,96.25
  Layer 2 w0.15: v7(24.4,72) 24.4,90.1 26,91.7 v6(26,91.712)
  Bottom Layer w0.15: DD1.89@24.4,69.35 v7(24.4,72)
TX_N: R16.1 U1.28 X1.2 | length 13.7
  Top Layer w0.15: U1.28@34.652,59.143 34.704,59.195 35.071,59.195 35.978,59.195 R16.1@36.251,58.922 36.568,58.605 37.125,58.605 37.433,58.297 40.732,58.297 42.005,57.024 44.613,57.024 45.326,56.311 45.326,56.187 45.238,56.099 X1.2@43.703,56.099
TX_P: R15.1 U1.29 X1.1 | length 14.5
  Top Layer w0.15: U1.29@34.652,59.651 34.704,59.599 35.452,59.599 35.475,59.622 36.844,59.622 36.891,59.576 37.447,59.576 R15.1@37.826,59.197 37.851,59.197 38.251,58.797 38.251,58.789 38.339,58.701 40.899,58.701 41.9,57.7 42.172,57.428 44.781,57.428 45.73,56.478 45.73,55.977 X1.1@46.878,54.829
TX_TMC: DD1.68 U2.14 | length 16.2
  Top Layer w0.15: v6(40.7,85.3) 40.751,85.3 41.026,85.575 U2.14@41.75,85.575
  Layer 2 w0.15: v7(40.7,81.4) v6(40.7,85.3)
  Bottom Layer w0.15: DD1.68@32.475,74.425 33.725,74.425 v7(40.7,81.4)
TXD: DD1.78 R32.2 X10.1 | length 55.5
  Top Layer w0.2: v12(32.715,94.488) 32.715,93.2 R32.2@32.1,93.2 32.1,94.954 32.921,95.775 X10.1@32.921,96.25
  Layer 2 w0.2: v12(32.715,94.488) v15(36.601,90.602)
  Bottom Layer w0.2: DD1.78@29.9,69.35 29.9,67.945 31.449,66.396 38.913,66.396 39.827,67.31 39.827,74.524 45.06,79.756 45.06,88.011 42.469,90.602 v15(36.601,90.602)
YL_A: U1.3 X1.11 | length 30.5
  Top Layer w0.2: v4(32.6,62.8) 32.936,62.464 32.936,61.875 U1.3@32.963,61.848
  Bottom Layer w0.2: v4(32.6,62.8) 35.2,65.4 48.25,65.4 52.55,61.1 56.324,61.1 X1.11@58.308,63.084
  other v3: 32.6,62.8
YL_K: R19.2 X1.12 | length 3
  Top Layer w0.2: R19.2@56.375,68.65 56.403,68.622 X1.12@56.403,65.624
pads on no net: DA4.1 DA4.6 DD1.2 DD1.3 DD1.4 DD1.5 DD1.7 DD1.8 DD1.15 DD1.17 DD1.18 DD1.36 DD1.38 DD1.41 DD1.42 DD1.43 DD1.44 DD1.45 DD1.46 DD1.47 DD1.53 DD1.54 DD1.55 DD1.56 DD1.57 DD1.58 DD1.59 DD1.64 DD1.65 DD1.66 DD1.70 DD1.71 DD1.77 DD1.80 DD1.82 DD1.83 DD1.84 DD1.85 DD1.86 DD1.87 DD1.88 DD1.90 DD1.91 DD1.92 DD1.93 DD1.95 DD1.96 DD1.97 DD1.98 U1.4 U1.14 U1.18 U1.20 U1.26 U2.25 X1.4 X1.5 X1.15 X1.16 X4.3 X4.4 X4.7 X4.8 X6.3 X6.4 X9.5 X9.6 X10.4 X10.5 X11.7 X11.8

## Polygon pours and split planes (outlines as drawn)
GND_EXT on Bottom Layer "GND_EXT_L04_P016" (solid, pour order 16): 44,29 60,29 60,0 44,0
GND on Top Layer "GND_L01_P020" (solid, pour order 20): 9.075,41.95 9.075,44.95 3.2,44.95 3.2,41.95
NetC6_1 on Top Layer "NETC6_1_L01_P013" (solid, remove dead copper, pour order 13): 41.875,34 41.875,37 42.375,37.5 42.375,39.75 46.625,39.75 46.625,35 44.875,35 43.875,34
NetC6_2 on Top Layer "NETC6_2_L01_P014" (solid, remove dead copper, pour order 14): 41.625,34 40.125,34 40.125,36.5 39.375,37.25 39.375,39.25 42.125,39.25 42.125,37.5 41.625,37
+12V on Top Layer "+12V_L01_P012" (solid, remove dead copper, pour order 12): 47.375,30.25 44.625,30.25 44.625,33 42.625,33 42.625,34 43.875,34 44.875,35 46.125,35 46.125,31.75 47.375,31.75
GND on Layer 3 "GND_L03_P018" (solid, pour order 18): 0,0 0,100 60,100 60,31 42,31 42,0

## Silkscreen, mask and mechanical layers (free items; w line width, h text height)
Top Overlay:
  text "STEPPER" at 49.554,95.054 h1.52
  text "UART" at 39.196,94.104 h1.52 r90
  text "ST-LINK" at 19.179,92.979 h1.52
  text "Basler IO" at 1.383,89.1 h1.52 r90
  text "Laser ctrl" at 1.184,81.5 h1.52 r90
  text "Laser power" at 1.029,70.3 h1.52 r90
  text "+5V" at 2.196,59.679 h1.52 r90
  text "Switch" at 1.183,50.5 h1.52 r90
  text "+5V0" at 8.364,49.341 h1.52
  text "+3V3" at 43.454,45.554 h1.52
  text "GND" at 54.254,37.454 h1.52
  text "Basler Power" at 1.084,31.6 h1.52 r90
  text "+12V" at 32.979,29.679 h1.52

## Text inside footprints (layer, text, board x,y; h text height)
DA3: Top Overlay "*" at 29.21,37.138 h1.27 r90; Mechanical 13 "*" at 25.87,38.408 h1.27 r90
U1: Top Overlay "*" at 34.451,62.797 h1.27 r270; Mechanical 13 "*" at 33.598,61.759 h1.27 r270